# EAGLE board CT_schematic (EAGLE 7.6.0)

Size 100 x 80 mm. Coordinates in mm from the lower left corner, seen from the top.
Outline: 0,0 100,0 100,80 0,80 0,0
Copper layers (1*16): Top 0.035mm / dielectric 1.5mm / Bottom 0.035mm
Design rules "default": minimum track width 10mil, minimum drill 24mil, track to track 8mil, track to pad 8mil, pad to pad 8mil, via to via 8mil, smd to smd 8mil, copper to edge 40mil, drill to drill 8mil, minimum pad ring 10mil, minimum via ring 8mil, stop-mask expansion 4mil, vias tented up to drill 0mil, thermal gap 10mil

## Footprints (pad centres in the part's own frame; a part is rotated, then mirrored left to right if it is on the bottom)
C0603 = smd 0.8 x 0.8: 1 -0.762,0; 2 0.762,0
C0402 = smd 0.5 x 0.5: 1 -0.508,0; 2 0.508,0
C1210 = smd 1.2 x 2.5: 1 -1.524,0; 2 1.524,0
C0805 = smd 1.2 x 1.3: 1 -1.016,0; 2 1.016,0
R0603 = smd 0.8 x 0.8: 1 -0.762,0; 2 0.762,0
EXV-9H = smd 3.505 x 1.676: 1 -2.857,0; 2 2.857,0
L0603 = smd 0.8 x 0.8: 1 -0.762,0; 2 0.762,0
IND25X25CZ = smd 2.489 x 3.429: 1 -2.718,0; 2 2.718,0
PJ-037B_PACKAGE = drill 3.7 square: 1 12,0 | drill 3.2 square: 2 6,0
WLCSP104 = smd 0.229 x 0.229: A1 -1.6,2.2; A2 -1.2,2.2; A3 -0.8,2.2; A4 -0.4,2.2; A5 0,2.2; A6 0.4,2.2; A7 0.8,2.2; A8 1.2,2.2; A9 1.6,2.2; B1 -1.6,1.8; B2 -1.2,1.8; B3 -0.8,1.8; B4 -0.4,1.8; B5 0,1.8; B6 0.4,1.8; B7 0.8,1.8; B8 1.2,1.8; B9 1.6,1.8; C1 -1.6,1.4; C2 -1.2,1.4; C3 -0.8,1.4; C4 -0.4,1.4; C5 0,1.4; C6 0.4,1.4; C7 0.8,1.4; C8 1.2,1.4; C9 1.6,1.4; D1 -1.6,1; D2 -1.2,1; D3 -0.8,1; D4 -0.4,1; D5 0,1; D6 0.4,1; D7 0.8,1; D8 1.2,1; D9 1.6,1; E1 -1.6,0.6; E2 -1.2,0.6; E3 -0.8,0.6; E4 -0.4,0.6; E6 0.4,0.6; E7 0.8,0.6; E8 1.2,0.6; E9 1.6,0.6; F1 -1.6,0.2; F2 -1.2,0.2; F3 -0.8,0.2; F4 -0.4,0.2; F6 0.4,0.2; F7 0.8,0.2; F8 1.2,0.2; F9 1.6,0.2; G1 -1.6,-0.2; G2 -1.2,-0.2; G3 -0.8,-0.2; G4 -0.4,-0.2; G6 0.4,-0.2; G7 0.8,-0.2; G8 1.2,-0.2; G9 1.6,-0.2; H1 -1.6,-0.6; H2 -1.2,-0.6; H3 -0.8,-0.6; H4 -0.4,-0.6; H6 0.4,-0.6; H7 0.8,-0.6; H8 1.2,-0.6; H9 1.6,-0.6; J1 -1.6,-1; J2 -1.2,-1; J3 -0.8,-1; J4 -0.4,-1; J5 0,-1; J6 0.4,-1; J7 0.8,-1; J8 1.2,-1; J9 1.6,-1; K1 -1.6,-1.4; K2 -1.2,-1.4; K3 -0.8,-1.4; K4 -0.4,-1.4; K5 0,-1.4; K6 0.4,-1.4; K7 0.8,-1.4; K8 1.2,-1.4; K9 1.6,-1.4; L1 -1.6,-1.8; L2 -1.2,-1.8; L3 -0.8,-1.8; L4 -0.4,-1.8; L5 0,-1.8; L6 0.4,-1.8; L7 0.8,-1.8; L8 1.2,-1.8; L9 1.6,-1.8; M1 -1.6,-2.2; M2 -1.2,-2.2; M3 -0.8,-2.2; M4 -0.4,-2.2; M5 0,-2.2; M6 0.4,-2.2; M7 0.8,-2.2; M8 1.2,-2.2; M9 1.6,-2.2
SOIC-8 = smd 1.6 x 0.6: 1 -2.7,1.905 | smd 1.55 x 0.6: 2 -2.7,0.635; 3 -2.7,-0.635; 4 -2.7,-1.905; 5 2.7,-1.905; 6 2.7,-0.635; 7 2.7,0.635; 8 2.7,1.905
SAMTEC_FTSH-105-01-L-DV-K = smd 0.762 x 2.794: 1 -2.54,-2.032; 2 -2.54,2.032; 3 -1.27,-2.032; 4 -1.27,2.032; 5 0,-2.032; 6 0,2.032; 7 1.27,-2.032; 8 1.27,2.032; 9 2.54,-2.032; 10 2.54,2.032
DFN8-S = smd 0.6 x 0.4: 1 -2.69,1.905; 2 -2.69,0.635; 3 -2.69,-0.635; 4 -2.69,-1.905; 5 2.69,-1.905; 6 2.69,-0.635; 7 2.69,0.635; 8 2.69,1.905
QFN-28 = smd 0.813 x 0.305: 1 -2.451,1.5; 2 -2.451,1; 3 -2.451,0.5; 4 -2.451,0; 5 -2.451,-0.5; 6 -2.451,-1; 7 -2.451,-1.5; 15 2.451,-1.5; 16 2.451,-1; 17 2.451,-0.5; 18 2.451,0; 19 2.451,0.5; 20 2.451,1; 21 2.451,1.5 | smd 0.305 x 0.813: 8 -1.5,-2.451; 9 -1,-2.451; 10 -0.5,-2.451; 11 0,-2.451; 12 0.5,-2.451; 13 1,-2.451; 14 1.5,-2.451; 22 1.5,2.451; 23 1,2.451; 24 0.5,2.451; 25 0,2.451; 26 -0.5,2.451; 27 -1,2.451; 28 -1.5,2.451 | smd 3.607 x 3.607: 29 0,0
SJ-43515TS-SMT-TR = smd 2.2 x 3: 1 0.6,-7.4; 4 3.4,-7.4 | smd 3 x 3: 2 12.8,-7.4; 5 17,-3 | smd 2 x 3: 3 5.3,0; 6 2.5,0 | drill 1.8: P$7 4.5,-3.69; P$8 11.54,-3.69
ABLS-25.000MHZ-B2F-T = smd 5.6 x 2.8: 1 -3.81,0; 2 5.69,0
ASEK = smd 1.4 x 1: 1 -1.1,-0.8; 2 1.1,-0.8; 3 1.1,0.8; 4 -1.1,0.8
ASFL1 = smd 1.7 x 1.5: 1 -1.27,-1.1; 2 1.27,-1.1; 3 1.27,1.1; 4 -1.27,1.1
IR3899MTR1PBF = smd 0.25 x 0.75: 1 0,0; 2 0.5,0; 3 1,0; 4 1.5,0; 5 2,0; 6 2.5,0; 7 3,0 | smd 0.75 x 0.25: 8 3.425,0.78; 9 3.425,1.28; 10 3.425,1.78; 14 -0.425,1.78; 15 -0.425,1.28; 16 -0.425,0.78 | smd 0.3 x 1.95: 11 3.22,3.63 | smd 1.62 x 2.42: 12 1.786,3.8 | smd 1 x 1.95: 13 0.117,3.63 | smd 2.19 x 1.25: 17 1.51,1.26
SON-6 = smd 0.55 x 0.3: 1 -0.355,0.5 | smd 0.52 x 0.3: 2 -0.37,0; 3 -0.37,-0.5; 4 0.37,-0.5; 5 0.37,0; 6 0.37,0.5
SW_4-1437565-2 = smd 1.4 x 2.1: 1 -2.23,4.55; 2 -2.23,-4.55; 3 2.23,4.55; 4 2.23,-4.55
LGM67K-G1J2-24-Z = smd 0.8 x 1.4: A -2,0; C 0,0
NC7SZ125M5X = smd 1.3 x 0.7: 1 -1.3,0.95; 2 -1.3,0; 3 -1.3,-0.95; 4 1.3,-0.95; 5 1.3,0.95

## Placement (x,y rotation side)
C1  1e-07  [C0603]  -19.05,74.93 0 top  (outside the outline)
C2  1e-07  [C0603]  -22.86,74.93 0 top  (outside the outline)
C3  1e-07  [C0603]  -26.67,74.93 0 top  (outside the outline)
C4  1e-07  [C0603]  -30.48,74.93 0 top  (outside the outline)
C5  1e-07  [C0603]  -34.29,74.93 0 top  (outside the outline)
C6  1e-07  [C0603]  -38.1,74.93 0 top  (outside the outline)
C7  1e-07  [C0603]  -41.91,74.93 0 top  (outside the outline)
C8  4.7e-06  [C0603]  -80.01,69.85 0 top  (outside the outline)
C9  1e-07  [C0603]  -45.72,74.93 0 top  (outside the outline)
C10  1e-08  [C0603]  -49.53,74.93 0 top  (outside the outline)
C11  1e-06  [C0603]  -53.34,74.93 0 top  (outside the outline)
C12  1e-11  [C0402]  -26.67,80.01 0 top  (outside the outline)
C13  1e-11  [C0402]  -30.48,80.01 0 top  (outside the outline)
C14  1e-08  [C0402]  -34.29,80.01 0 top  (outside the outline)
C15  1e-07  [C0402]  -38.1,80.01 0 top  (outside the outline)
C16  1e-08  [C0402]  -41.91,80.01 0 top  (outside the outline)
C17  2.2e-05  [C1210]  -67.31,50.8 0 top  (outside the outline)
C18  2.2e-05  [C1210]  -73.66,50.8 0 top  (outside the outline)
C19  1e-09  [C0402]  -45.72,80.01 0 top  (outside the outline)
C20  1e-09  [C0402]  -49.53,80.01 0 top  (outside the outline)
C21  1e-07  [C0402]  -53.34,80.01 0 top  (outside the outline)
C22  1e-07  [C0402]  -57.15,80.01 0 top  (outside the outline)
C23  1e-07  [C0402]  -60.96,80.01 0 top  (outside the outline)
C24  1e-07  [C0402]  -64.77,80.01 0 top  (outside the outline)
C25  1e-07  [C0402]  -68.58,80.01 0 top  (outside the outline)
C26  1e-05  [C0805]  -34.29,58.42 0 top  (outside the outline)
C27  1e-05  [C0805]  -39.37,58.42 0 top  (outside the outline)
C28  1e-05  [C0805]  -44.45,58.42 0 top  (outside the outline)
C29  1e-05  [C0805]  -49.53,58.42 0 top  (outside the outline)
C30  1e-05  [C0805]  -54.61,58.42 0 top  (outside the outline)
C31  1e-08  [C0402]  -72.39,80.01 0 top  (outside the outline)
C32  1e-08  [C0402]  -76.2,80.01 0 top  (outside the outline)
C33  0.0001  [C1210]  -16.51,59.69 0 top  (outside the outline)
C34  2.2e-06  [C0603]  -15.24,74.93 0 top  (outside the outline)
C35  1e-07  [C0402]  -80.01,80.01 0 top  (outside the outline)
C36  1e-07  [C0402]  -15.24,85.09 0 top  (outside the outline)
C37  8.7488758840791e-09  [R0603]  -64.77,58.42 0 top  (outside the outline)
C38  2.9825713241179e-07  [R0603]  -74.93,58.42 0 top  (outside the outline)
C41  1e-07  [C0402]  -19.05,85.09 0 top  (outside the outline)
C42  0.0001  [EXV-9H]  -46.99,43.18 0 top  (outside the outline)
C43  0.0001  [EXV-9H]  -58.42,43.18 0 top  (outside the outline)
C44  1e-08  [C0402]  -22.86,85.09 0 top  (outside the outline)
C45  1e-08  [C0402]  -26.67,85.09 0 top  (outside the outline)
F1  240.0  [L0603]  -57.15,74.93 0 top  (outside the outline)
I1  6.8e-07  [IND25X25CZ]  -38.1,52.07 0 top  (outside the outline)
J1  PJ-037B  [PJ-037B_PACKAGE]  -55.88,21.59 0 top  (outside the outline)
R2  1000.0  [R0603]  -60.96,74.93 0 top  (outside the outline)
R4  4700.0  [R0603]  -64.77,74.93 0 top  (outside the outline)
R5  2200.0  [R0603]  -68.58,74.93 0 top  (outside the outline)
R6  2200.0  [R0603]  -72.39,74.93 0 top  (outside the outline)
R7  10000.0  [R0603]  -57.15,64.77 0 top  (outside the outline)
R8  10000.0  [R0603]  -62.23,64.77 0 top  (outside the outline)
R9  10000.0  [R0603]  -67.31,64.77 0 top  (outside the outline)
R10  10000.0  [R0603]  -72.39,64.77 0 top  (outside the outline)
R11  10000.0  [R0603]  -77.47,64.77 0 top  (outside the outline)
R12  10000.0  [R0603]  -15.24,69.85 0 top  (outside the outline)
R13  10000.0  [R0603]  -20.32,69.85 0 top  (outside the outline)
R14  10000.0  [R0603]  -25.4,69.85 0 top  (outside the outline)
R15  5.0  [R0603]  -76.2,74.93 0 top  (outside the outline)
R16  10000.0  [R0603]  -30.48,69.85 0 top  (outside the outline)
R17  10000.0  [R0603]  -35.56,69.85 0 top  (outside the outline)
R18  10000.0  [R0603]  -40.64,69.85 0 top  (outside the outline)
R19  47000.0  [R0603]  -45.72,69.85 0 top  (outside the outline)
R20  47000.0  [R0603]  -50.8,69.85 0 top  (outside the outline)
R21  47000.0  [R0603]  -55.88,69.85 0 top  (outside the outline)
R22  680.0  [R0603]  -80.01,74.93 0 top  (outside the outline)
R23  0.1  [R0603]  -15.24,80.01 0 top  (outside the outline)
R24  4030.2416170974  [R0603]  -19.05,64.77 0 top  (outside the outline)
R25  719.68600305311  [R0603]  -26.67,64.77 0 top  (outside the outline)
R26  58.26650887574  [R0603]  -41.91,64.77 0 top  (outside the outline)
R27  130.0  [R0603]  -19.05,80.01 0 top  (outside the outline)
R28  39000.0  [R0603]  -60.96,69.85 0 top  (outside the outline)
R29  49900.0  [R0603]  -66.04,69.85 0 top  (outside the outline)
R30  5113.9346405229  [R0603]  -34.29,64.77 0 top  (outside the outline)
R31  10000.0  [R0603]  -71.12,69.85 0 top  (outside the outline)
R32  10000.0  [R0603]  -76.2,69.85 0 top  (outside the outline)
R33  9100.0  [R0603]  -22.86,80.01 0 top  (outside the outline)
R34  680000.0  [R0603]  -46.99,64.77 0 top  (outside the outline)
R35  120000.0  [R0603]  -52.07,64.77 0 top  (outside the outline)
U1  STM32L151VDY6XTR  [WLCSP104]  -16.51,43.18 0 top  (outside the outline)
U2  AT25320B-SSHL-T  [SOIC-8]  -53.34,34.29 0 top  (outside the outline)
U3  FTSH-105-01-L-DV-K  [SAMTEC_FTSH-105-01-L-DV-K]  -35.56,7.62 0 top  (outside the outline)
U4  24AA256-I/MF  [DFN8-S]  -38.1,34.29 0 top  (outside the outline)
U5  WM8731CLSEFL  [QFN-28]  -59.69,52.07 0 top  (outside the outline)
U6  SJ-43515TS-SMT-TR  [SJ-43515TS-SMT-TR]  -68.58,10.16 0 top  (outside the outline)
U7  SJ-43515TS-SMT-TR  [SJ-43515TS-SMT-TR]  -39.37,24.13 0 top  (outside the outline)
U8  ABLS-25.000MHZ-B2F-T  [ABLS-25.000MHZ-B2F-T]  -26.67,52.07 0 top  (outside the outline)
U9  ASEK-32.768KHz-ECST  [ASEK]  -38.1,43.18 0 top  (outside the outline)
U10  ASFL1-12.288MHZ-EC-T  [ASFL1]  -74.93,34.29 0 top  (outside the outline)
U11  IR3899MTR1PBF  [IR3899MTR1PBF]  -25.4,31.75 0 top  (outside the outline)
U12  TPS3895ADRYR  [SON-6]  -29.21,83.82 0 top  (outside the outline)
U13  4-1437565-2  [SW_4-1437565-2]  -72.39,21.59 0 top  (outside the outline)
U14  Q65110A2395  [LGM67K-G1J2-24-Z]  -46.99,52.07 0 top  (outside the outline)
U15  nc7sz125m5x  [NC7SZ125M5X]  -21.59,58.42 0 top  (outside the outline)
U16  nc7sz125m5x  [NC7SZ125M5X]  -27.94,58.42 0 top  (outside the outline)

## Library data of the parts
C1-C38 C41-C45 F1 I1 J1 R2 R4-R35 U1-U16 = circuit_tree

## Nets
CLK_CRYSTAL_U1_F8: C12.1 U1.F8 U8.1
CLK_CRYSTAL_U1_F9: C13.1 U1.F9 U8.2
CLK_U1_D8: U1.D8 U9.3
CLK_U5_1: U5.1 U10.3
GND: C1.2 C2.2 C3.2 C4.2 C5.2 C6.2 C7.2 C8.2 C9.2 C10.2 C11.2 C12.2 C13.2 C14.2 C15.2 C16.2 C20.2 C21.2 C22.2 C23.2 C24.2 C25.2 C26.2 C27.2 C28.2 C29.2 C30.2 C31.2 C32.2 C34.2 C35.2 C36.2 C41.2 C42.2 C43.2 C44.2 C45.2 J1.2 R2.2 R7.2 R14.2 R15.2 R17.2 R18.2 R19.2 R20.2 R21.2 R23.1 R23.2 R25.2 R28.2 R30.2 R33.2 R35.2 U1.A1 U1.C7 U1.D2 U1.E8 U1.H8 U1.J9 U1.K8 U1.L2 U1.M1 U2.4 U3.3 U3.5 U4.4 U5.4 U5.15 U5.19 U5.25 U5.26 U5.29 U6.1 U7.1 U9.2 U10.2 U11.4 U11.11 U11.17 U12.2 U14.C U15.2 U15.3 U16.1 U16.3
NET_U1_A7: R7.1 U1.A7
NET_U1_B6: R6.1 U1.B6 U4.5
NET_U1_C5: R5.1 U1.C5 U4.6
NET_U1_E7: C9.1 U1.E7
NET_U1_F7: R4.1 U1.F7 U16.4
NET_U1_G6: C10.1 C11.1 F1.1 U1.G6 U1.G7
NET_U1_M7: U14.A
NET_U1_M8: U13.3 U13.4
NET_U2_3: R8.1 U2.3
NET_U2_7: R10.1 U2.7
NET_U3_9: R15.1 U3.9
NET_U4_1: R16.1 U4.1
NET_U4_2: R17.1 U4.2
NET_U4_3: R18.1 U4.3
NET_U5_9: U5.9
NET_U5_20: C25.1 C30.1 U5.20
NET_U6_2: C18.1 R20.1 U6.2
NET_U6_5: C17.1 R19.1 U6.5
NET_U6_13: C17.2
NET_U6_14: C18.2
NET_U7_5: C19.1 C20.1 R21.1 R22.1 U7.5
NET_U7_21: R22.2
NET_U7_22: C19.2
NET_U11_1: C37.1 R24.1 R25.1 R26.1 R27.1 U11.1 U11.8
NET_U11_2: C36.1 U11.2
NET_U11_3: C37.2 C38.1 C38.2 U11.3
NET_U11_5: R28.1 U11.5
NET_U11_10: C34.1 U11.10
NET_U11_12: C33.1 I1.1 U11.12
NET_U11_13: U11.13
NET_U11_14: C33.2 U11.14
NET_U11_15: R29.1 R30.1 U11.15
NET_U11_ATNET_3: I1.2 R24.2
NET_U11_ATNET_4: C38.2 R26.2
NET_U11_ATNET_5: R27.2
NET_U12_1: R32.1 R33.1 U12.1
NET_U12_3: R34.2 R35.1 U12.3
NET_U12_4: R31.1 U12.4 U15.4 U16.2
NET_U13_1: R2.1 U13.1 U13.2
PROC_I2S2_CK: U1.D4 U5.7
PROC_I2S2_SD: U1.A3 U5.8
PROC_I2S2_WS: U1.A2 U5.9 U5.11
PROC_SPI1_MISO: U1.A5 U2.2
PROC_SPI1_MOSI: U1.A6 U2.5
PROC_SPI1_NSS: R9.1 U1.J7 U2.1
PROC_SPI1_SCK: U1.K5 U2.6
PROC_SYS_JTCK_SWCLK: R14.1 U1.D3 U3.4
PROC_SYS_JTDI: R12.1 U1.B1 U3.8
PROC_SYS_JTDO_TRACESWO: U1.B5 U3.6
PROC_SYS_JTMS_SWDIO: R13.1 U1.E3 U3.2
RST_OUT_U3_JTAG_RST_B: R11.1 U3.10 U15.1
VCC_S1_16V9: C35.1 C42.1 C43.1 J1.1 R29.2 U11.9
VCC_TIER1_3V3: C1.1 C2.1 C3.1 C4.1 C5.1 C6.1 C7.1 C8.1 C14.1 C15.1 C16.1 C21.1 C22.1 C23.1 C24.1 C26.1 C27.1 C28.1 C29.1 C31.1 C32.1 C41.1 C44.1 C45.1 F1.2 I1.2 R4.2 R5.2 R6.2 R8.2 R9.2 R10.2 R11.2 R12.2 R13.2 R16.2 R24.2 R31.2 R32.2 R34.1 U1.A9 U1.B8 U1.C1 U1.E9 U1.K3 U1.L8 U1.M9 U2.8 U3.1 U4.7 U4.8 U5.3 U5.5 U5.12 U5.18 U9.4 U10.4 U12.6 U15.5 U16.5

## Tracks (layer width: path | path; a pad name or v marks a point on that pad's centre or on a via)
CLK_CRYSTAL_U1_F8  (2 unrouted)
CLK_CRYSTAL_U1_F9  (2 unrouted)
CLK_U1_D8  (1 unrouted)
CLK_U5_1  (1 unrouted)
GND  (85 unrouted)
NET_U1_A7  (1 unrouted)
NET_U1_B6  (2 unrouted)
NET_U1_C5  (2 unrouted)
NET_U1_E7  (1 unrouted)
NET_U1_F7  (2 unrouted)
NET_U1_G6  (4 unrouted)
NET_U1_M8  (1 unrouted)
NET_U2_3  (1 unrouted)
NET_U2_7  (1 unrouted)
NET_U3_9  (1 unrouted)
NET_U4_1  (1 unrouted)
NET_U4_2  (1 unrouted)
NET_U4_3  (1 unrouted)
NET_U5_20  (2 unrouted)
NET_U6_2  (2 unrouted)
NET_U6_5  (2 unrouted)
NET_U7_5  (4 unrouted)
NET_U11_1  (6 unrouted)
NET_U11_2  (1 unrouted)
NET_U11_3  (3 unrouted)
NET_U11_5  (1 unrouted)
NET_U11_10  (1 unrouted)
NET_U11_12  (2 unrouted)
NET_U11_14  (1 unrouted)
NET_U11_15  (2 unrouted)
NET_U11_ATNET_3  (1 unrouted)
NET_U11_ATNET_4  (1 unrouted)
NET_U12_1  (2 unrouted)
NET_U12_3  (2 unrouted)
NET_U12_4  (3 unrouted)
NET_U13_1  (2 unrouted)
PROC_I2S2_CK  (1 unrouted)
PROC_I2S2_SD  (1 unrouted)
PROC_I2S2_WS  (2 unrouted)
PROC_SPI1_MISO  (1 unrouted)
PROC_SPI1_MOSI  (1 unrouted)
PROC_SPI1_NSS  (2 unrouted)
PROC_SPI1_SCK  (1 unrouted)
PROC_SYS_JTCK_SWCLK  (2 unrouted)
PROC_SYS_JTDI  (2 unrouted)
PROC_SYS_JTDO_TRACESWO  (1 unrouted)
PROC_SYS_JTMS_SWDIO  (2 unrouted)
RST_OUT_U3_JTAG_RST_B  (2 unrouted)
VCC_S1_16V9  (5 unrouted)
VCC_TIER1_3V3  (59 unrouted)